# Allegro board demoa2.brd
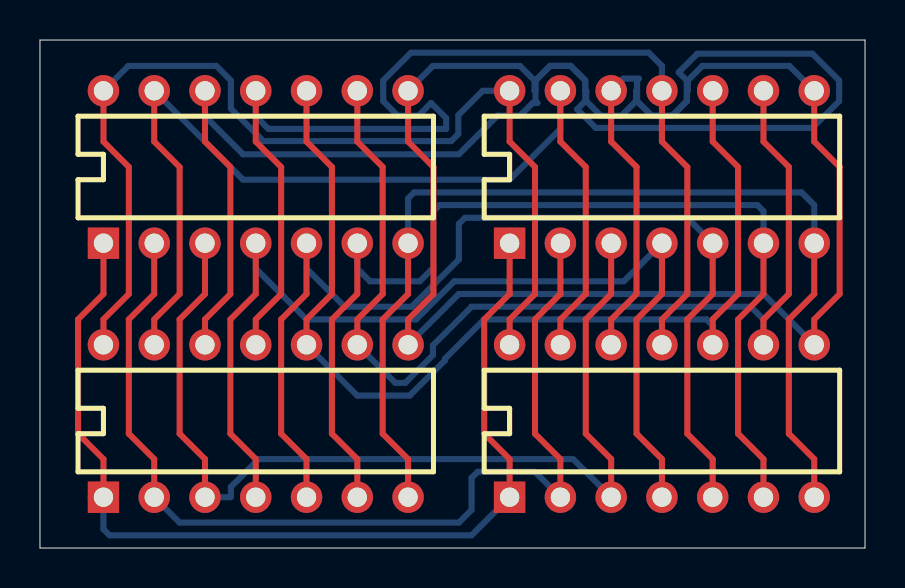
[diagram p0: board, top side]
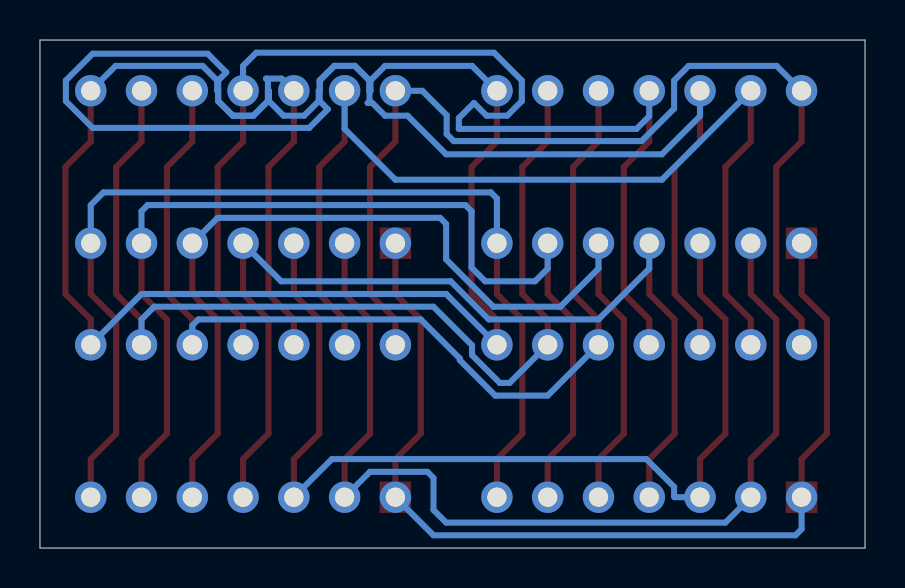
[diagram p1: board, bottom side, seen from below]

Outline 41.27 x 25.4 mm; copper layers: TOP, GND, POWER, INNER1, INNER2, BOTTOM. Coordinates in mm from the lower left corner of the outline.
Outline path: 0,25.4 0,0 41.27,0 41.27,25.4 0,25.4

## Design rules (mm)
nets with their own width: min track width 0.305; nets DAT1 DAT2 DAT3 DAT4 DAT5 DAT6 DAT7 DAT8 DAT9 DAT10 DAT11 DAT12 GND VCC

## Placement (name value [footprint] x y rotation side)
U1  7400  [DIP14]  3.17 15.24 0 top
U2  7400  [DIP14]  23.5 15.24 0 top
U3  7400  [DIP14]  3.17 2.54 0 top
U4  7400  [DIP14]  23.5 2.54 0 top

## Library data of the parts
U1-U4 = 7400

## Footprints (pads in the part's own frame, mm; a bottom-side part is the same pattern mirrored in y, then rotated)
DIP14
  rect 1.575x1.575 hole 0.965: 1(0,0)
  round 1.575 hole 0.965: 2(2.54,0) 3(5.08,0) 4(7.62,0) 5(10.16,0) 6(12.7,0) 7(15.24,0) 8(15.24,7.62) 9(12.7,7.62) 10(10.16,7.62) 11(7.62,7.62) 12(5.08,7.62) 13(2.54,7.62) 14(0,7.62)

## Nets
GND: U1.7(TP-7) U2.7(TP-7) U3.7(TP-7) U4.7(TP-7)
VCC: U1.14(TP-14) U2.14(TP-14) U3.14(TP-14) U4.14(TP-14)
DAT1: U1.2(TP-2) U2.2(TP-2) U3.2(TP-2) U4.2(TP-2)
DAT2: U1.1(TP-1) U2.1(TP-1) U3.1(TP-1) U4.1(TP-1)
DAT3: U1.3(TP-3) U2.3(TP-3) U3.3(TP-3) U4.3(TP-3)
DAT4: U1.5(TP-5) U2.5(TP-5) U3.5(TP-5) U4.5(TP-5)
DAT5: U1.4(TP-4) U2.4(TP-4) U3.4(TP-4) U4.4(TP-4)
DAT6: U1.6(TP-6) U2.6(TP-6) U3.6(TP-6) U4.6(TP-6)
DAT7: U1.10(TP-10) U2.10(TP-10) U3.10(TP-10) U4.10(TP-10)
DAT8: U1.9(TP-9) U2.9(TP-9) U3.9(TP-9) U4.9(TP-9)
DAT9: U1.8(TP-8) U2.8(TP-8) U3.8(TP-8) U4.8(TP-8)
DAT10: U1.13(TP-13) U2.13(TP-13) U3.13(TP-13) U4.13(TP-13)
DAT11: U1.12(TP-12) U2.12(TP-12) U3.12(TP-12) U4.12(TP-12)
DAT12: U1.11(TP-11) U2.11(TP-11) U3.11(TP-11) U4.11(TP-11)

## Routing (per net, layer and track width the routed paths; a pad name or vN(x,y) marks a point on that pad's centre or on a via; arc(x,y) is an arc through that point)
GND: length 52.4
  TOP w0.305: U2.7 38.73,12.7 37.46,11.43 37.46,5.71 38.73,4.45 U4.7 ; U3.7 18.42,4.45 17.15,5.71 17.15,11.43 18.42,12.7 U1.7
  BOTTOM w0.305: U1.7 18.42,17.48 18.72,17.78 38.1,17.78 38.73,17.14 U2.7
VCC: length 52.3
  TOP w0.305: U2.14 23.5,20.32 24.77,19.05 24.77,12.7 23.5,11.43 U4.14 ; U1.14 3.17,20.32 4.45,19.05 4.45,12.7 3.17,11.43 U3.14
  BOTTOM w0.305: U1.14 4.42,24.1 8.82,24.1 9.55,23.38 9.55,21.97 11.18,20.35 20.57,20.35 20.93,20.7 20.93,21.64 22.15,22.86 U2.14
DAT1: length 50.9
  TOP w0.305: U1.2 5.71,12.7 4.45,11.43 4.45,5.71 5.71,4.45 U3.2 ; U4.2 26.04,4.45 24.77,5.71 24.77,11.43 26.04,12.7 U2.2
  BOTTOM w0.305: U4.2 24.77,3.81 21.89,3.81 21.59,3.51 21.59,1.91 20.96,1.27 6.98,1.27 U3.2
DAT2: length 50.3
  TOP w0.305: U2.1 23.5,12.7 22.23,11.43 22.23,5.71 23.5,4.45 U4.1 ; U3.1 3.17,4.45 1.91,5.71 1.91,11.43 3.17,12.7 U1.1
  BOTTOM w0.305: U3.1 3.17,0.94 3.48,0.64 21.59,0.64 U4.1
DAT3: length 49.7
  TOP w0.305: U2.3 28.58,12.7 27.31,11.43 27.31,5.71 28.58,4.45 U4.3 ; U3.3 8.26,4.45 6.98,5.71 6.98,11.43 8.26,12.7 U1.3
  BOTTOM w0.305: U3.3 9.53,2.54 9.55,2.57 9.55,3.06 10.94,4.45 26.67,4.45 U4.3
DAT4: length 53.3
  TOP w0.305: U2.5 33.66,12.7 32.38,11.43 32.38,5.71 33.66,4.45 U4.5 ; U1.5 13.33,12.7 12.06,11.43 12.06,5.71 13.33,4.45 U3.5
  BOTTOM w0.305: U2.5 32.38,16.51 21.26,16.51 20.96,16.21 20.96,14.43 18.59,12.06 15.24,12.06 13.33,13.97 U1.5
DAT5: length 51.7
  TOP w0.305: U4.4 31.12,4.45 29.85,5.71 29.85,11.43 31.12,12.7 U2.4 ; U1.4 10.79,12.7 9.53,11.43 9.53,5.71 10.79,4.45 U3.4
  BOTTOM w0.305: U2.4 29.21,13.34 20.73,13.34 18.82,11.43 13.33,11.43 10.79,13.97 U1.4
DAT6: length 54.3
  TOP w0.305: U2.6 36.2,12.7 34.92,11.43 34.92,5.71 36.2,4.45 U4.6 ; U3.6 15.88,4.45 14.61,5.71 14.61,11.43 15.88,12.7 U1.6
  BOTTOM w0.305: U1.6 15.88,13.97 16.51,13.34 19,13.34 19.69,14.02 19.69,16.84 19.99,17.14 35.89,17.14 36.2,16.84 U2.6
DAT7: length 51.6
  TOP w0.305: U4.10 33.66,11.43 34.92,12.7 34.92,19.05 33.66,20.32 U2.10 ; U1.10 13.33,20.32 14.61,19.05 14.61,12.7 13.33,11.43 U3.10
  BOTTOM w0.305: U4.10 33.66,11.13 33.35,11.43 22.23,11.43 20.27,9.47 20.27,9.39 18.5,7.62 15.88,7.62 U3.10
DAT8: length 52
  TOP w0.305: U1.9 15.88,20.32 17.15,19.05 17.15,12.7 15.88,11.43 U3.9 ; U4.9 36.2,11.43 37.46,12.7 37.46,19.05 36.2,20.32 U2.9
  BOTTOM w0.305: U3.9 17.78,8.26 18.27,8.26 19.66,9.64 19.66,10.13 21.59,12.06 35.56,12.06 36.2,11.43 U4.9
DAT9: length 78.5
  TOP w0.305: U4.8 38.73,11.43 40,12.7 40,19.05 38.73,20.32 U2.8 ; U1.8 18.42,20.32 19.69,19.05 19.69,12.7 18.42,11.43 U3.8
  BOTTOM w0.305: U2.8 37.49,24.1 33.14,24.1 32.41,23.38 32.41,22.86 32.36,22.86 32.36,22.34 31.63,21.62 30.6,21.62 29.87,22.34 29.87,22.86 29.82,22.86 29.82,22.34 29.09,21.62 28.06,21.62 27.33,22.34 27.33,22.86 27.28,22.86 27.28,23.38 26.55,24.1 25.52,24.1 24.79,23.38 24.79,22.86 24.74,22.86 24.74,23.38 24.01,24.1 19.66,24.1 U1.8 17.78,22.86 ; U3.8 20.96,12.7 36.2,12.7 U4.8
DAT10: length 52.6
  TOP w0.305: U2.13 26.04,20.32 27.31,19.05 27.31,12.7 26.04,11.43 U4.13 ; U1.13 5.71,20.32 6.98,19.05 6.98,12.7 5.71,11.43 U3.13
  BOTTOM w0.305: U1.13 10.16,18.41 23.5,18.41 26.04,20.95 U2.13
DAT11: length 84.7
  TOP w0.305: U4.12 28.58,11.43 29.85,12.7 29.85,19.05 28.58,20.32 U2.12 ; U3.12 8.26,11.43 9.53,12.7 9.53,19.05 8.26,20.32 U1.12
  BOTTOM w0.305: U1.12 8.26,21.59 10.16,19.68 20.96,19.68 22.89,21.62 24.01,21.62 24.65,22.25 24.88,22.25 24.79,22.34 24.79,23.38 25.52,24.1 26.55,24.1 27.28,23.38 27.28,22.34 26.87,21.94 27.81,21.01 38.64,21.01 39.98,22.34 39.98,23.38 38.64,24.71 32.89,24.71 31.95,23.78 32.36,23.38 32.36,22.34 31.63,21.62 30.6,21.62 29.87,22.34 29.87,23.38 29.96,23.47 29.18,23.47 U2.12
DAT12: length 60.2
  TOP w0.305: U3.11 10.79,11.43 12.06,12.7 12.06,19.05 10.79,20.32 U1.11 ; U2.11 31.12,20.32 32.38,19.05 32.38,12.7 31.12,11.43 U4.11
  BOTTOM w0.305: U2.11 31.12,24.1 30.45,24.77 18.56,24.77 17.17,23.38 17.17,22.34 17.9,21.62 18.93,21.62 19.57,22.25 20.32,21.5 20.32,20.95 11.43,20.95 10.79,21.59 U1.11
